# EAGLE board eCog113_BLE_Bluetooth_HM10 (EAGLE 6.6.0)
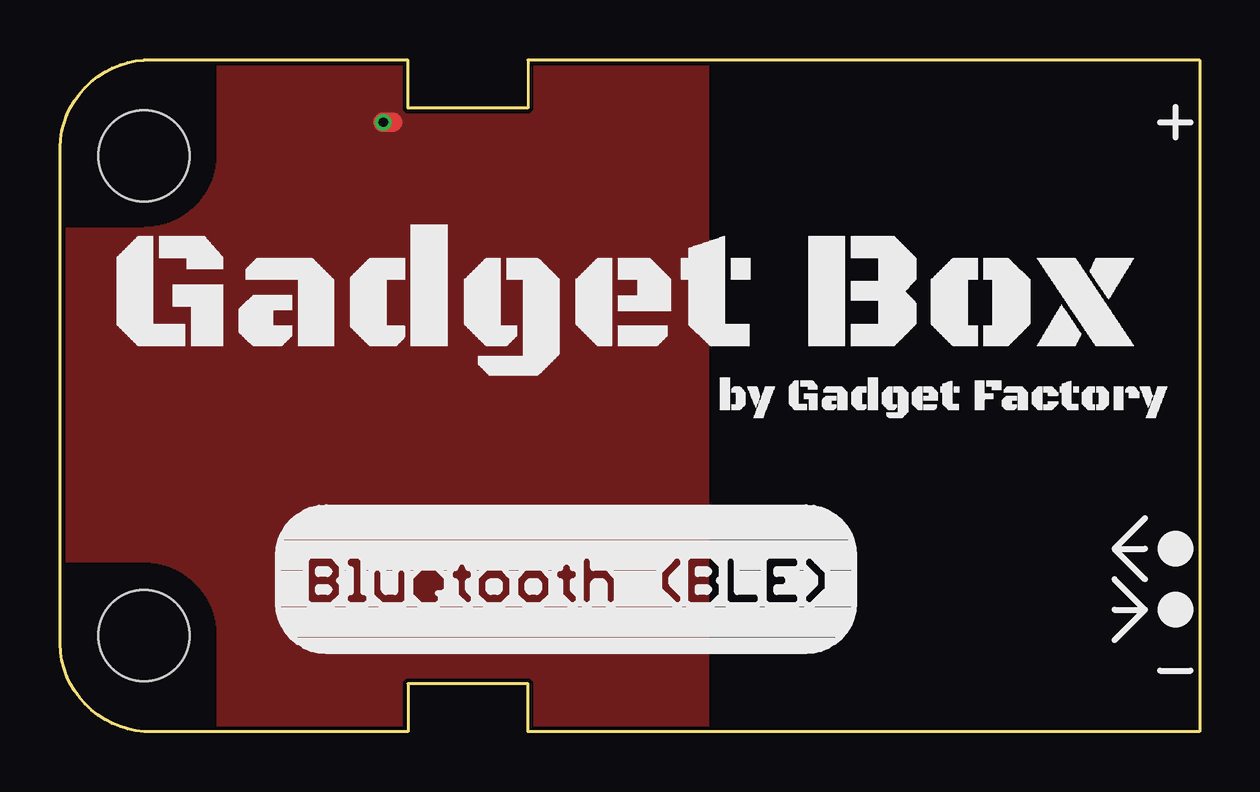
[diagram p0: board, top side]
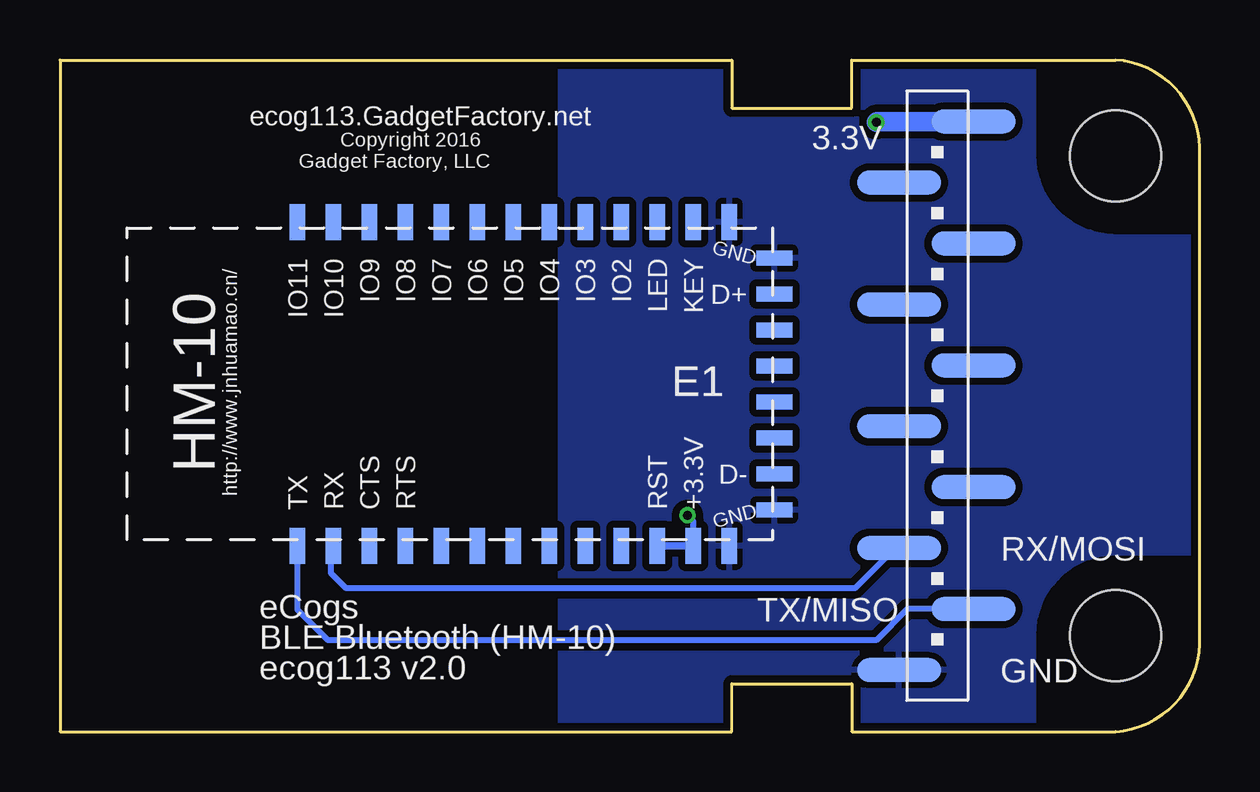
[diagram p1: board, bottom side, seen from below]

Size 47.51 x 28 mm. Coordinates in mm from the lower left corner, seen from the top.
Copper layers (1*16): Top 0.035mm / dielectric 1.5mm / Bottom 0.035mm
Design rules "hackvana *": minimum track width 6mil, minimum drill 0.3mm, track to track 6mil, track to pad 6mil, pad to pad 6mil, via to via 6mil, smd to smd 0mil, copper to edge 6mil, drill to drill 6mil, minimum pad ring 10mil, minimum via ring 6mil, stop-mask expansion 2mil, vias tented up to drill 100mil, thermal gap 10mil

## Footprints (pad centres in the part's own frame; a part is rotated, then mirrored left to right if it is on the bottom)
26.9X13X2.2_BOARD = smd 1.5 x 0.635: 1 -7.5,0; 2 -7.5,-1.5; 3 -7.5,-3; 4 -7.5,-4.5; 5 -7.5,-6; 6 -7.5,-7.5; 8 -7.5,-10.5; 9 -7.5,-12; 10 -7.5,-13.5; 11 -7.5,-15; 12 -7.5,-16.5; 13 -7.5,-18; 22 6,-18; 23 6,-16.5; 24 6,-15; 25 6,-13.5; 26 6,-12; 27 6,-10.5; 28 6,-9; 29 6,-7.5; 30 6,-6; 31 6,-4.5; 32 6,-3; 33 6,-1.5; 34 6,0; $7 -7.5,-9 | smd 0.635 x 1.5: 14 -6,-19.875; 15 -4.5,-19.875; 16 -3,-19.875; 17 -1.5,-19.875; 18 0,-19.875; 19 1.5,-19.875; 20 3,-19.875; 21 4.5,-19.875
ECOG_GENERAL_SMD = smd 3.5 x 1 bottom: 3V3 9.923,25.429; G0 9.923,5.111; G1 13.022,7.649; G2 9.923,10.189; G3 13.022,12.729; G4 9.923,15.269; G5 13.022,17.809; G6 9.923,20.349; G7 13.022,22.889; GND 13.022,2.571 | hole 3.8: 4,24; 4,4

## Placement (x,y rotation side)
E1  HM-10-BOARD  [26.9X13X2.2_BOARD]  37.61,15.24 90 bottom
ECOG  ECOG_GENERAL_ROWECOG_GENERAL_SMD  [ECOG_GENERAL_SMD]  -0.49,0 0 top
U$1  [GADGETBOX_TEXT]  23.64,17.78 0 top
U$2  [LEGEND_DIO]  46.5,7.62 0 top
U$3  [LEGEND_DIO]  46.5,5.08 0 top

## Library data of the parts
E1 = JNHuaMao
ECOG = eCogs; DIGIKEY: S1013EC-10-ND
U$1 = GadgetFactory
U$2 U$3 = eCogs

## Nets
3V3: E1.11 E1.12 ECOG.3V3
GND: E1.13 E1.14 E1.21 E1.22 ECOG.GND
RX/MOSI: E1.2 ECOG.G1
TX/MISO: E1.1 ECOG.G0

## Tracks (layer width: path | path; a pad name or v marks a point on that pad's centre or on a via)
3V3  (via drill 0.38)
  Top 0.254: v21.35,9.02 21.35,9.14 21.48,9.27
  Top 0.813: v13.48,25.4 13.86,25.4
  Bottom 0.254: E1.12 21.11,8.77 v21.35,9.02
  Bottom 0.305: E1.12 E1.11
  Bottom 0.813: ECOG.3V3 13.45,25.43 v13.48,25.4
  pour Top: -1.49,29 26.92,29 26.92,-1 -1.49,-1
GND
  pour Bottom (isolate 0.305): -2.49,30 26.65,30 26.65,-2 -2.49,-2
RX/MOSI
  Bottom 0.254: ECOG.G1 12.69,7.65 14.37,5.97 35.58,5.97 36.21,6.6 36.21,7.64 E1.2
TX/MISO
  Bottom 0.254: ECOG.G0 12.18,5.11 13.48,3.81 36.34,3.81 37.61,5.08 E1.1

## Text on the board
bPlace: ecog113.GadgetFactory.net | 3.3V | Copyright 2016 | Gadget Factory, LLC | RX/MOSI | TX/MISO | eCogs | BLE Bluetooth (HM-10) | GND | ecog113 v2.0